# Altium PCB BB_ARM_SWD.PcbDoc
Units mm, origin at the board's own origin, x right, y up, seen from the top; angles counter-clockwise.
Board outline 17 x 29 mm, 2 copper layers (Top Layer, Bottom Layer); 7 components, 11 nets, 44 pads, 0 vias.
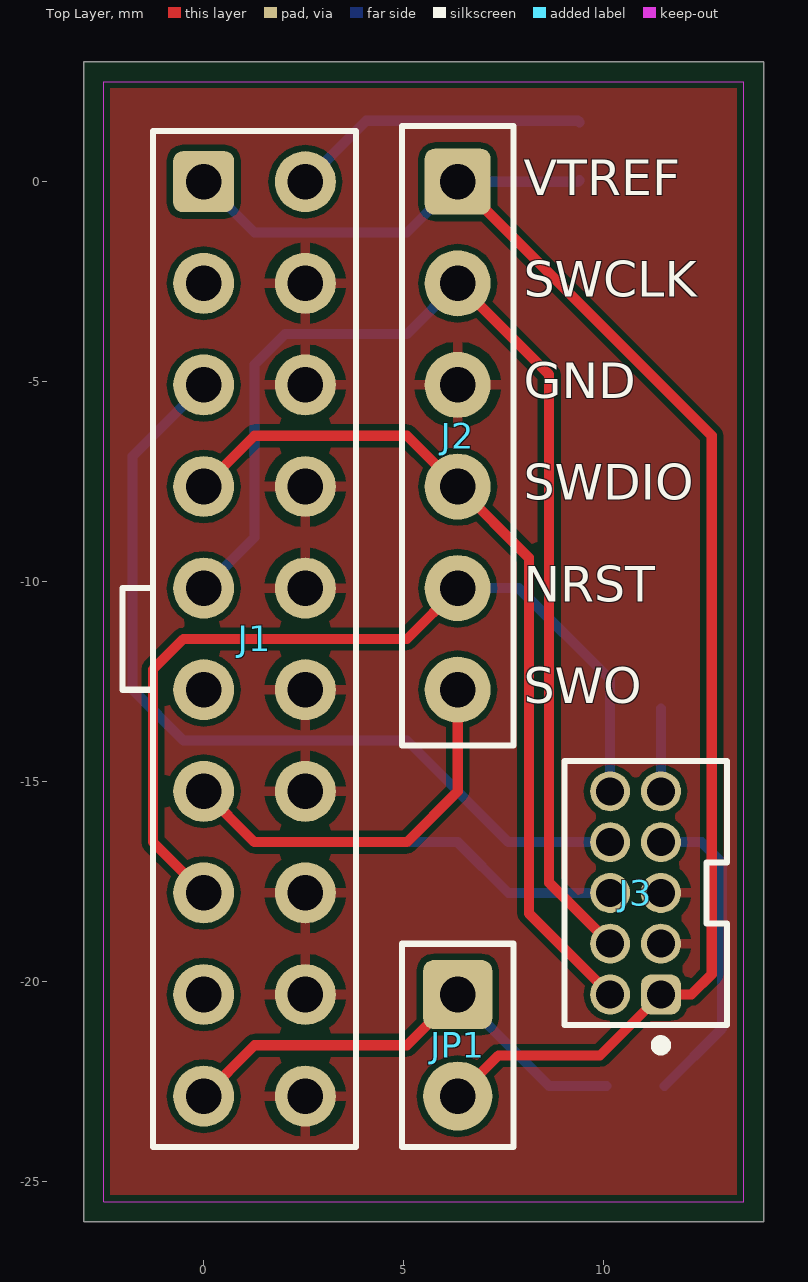
[diagram p0: Top Layer view]
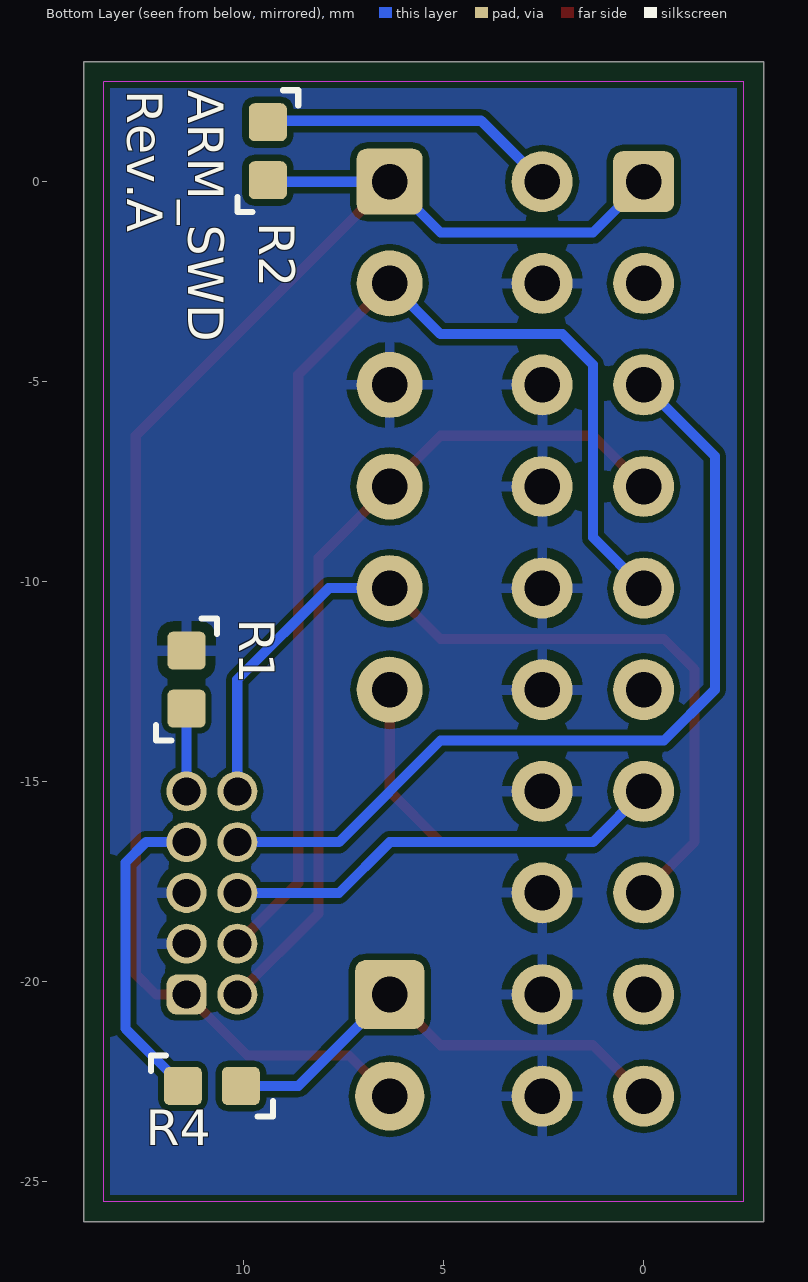
[diagram p1: Bottom Layer view, seen from below]
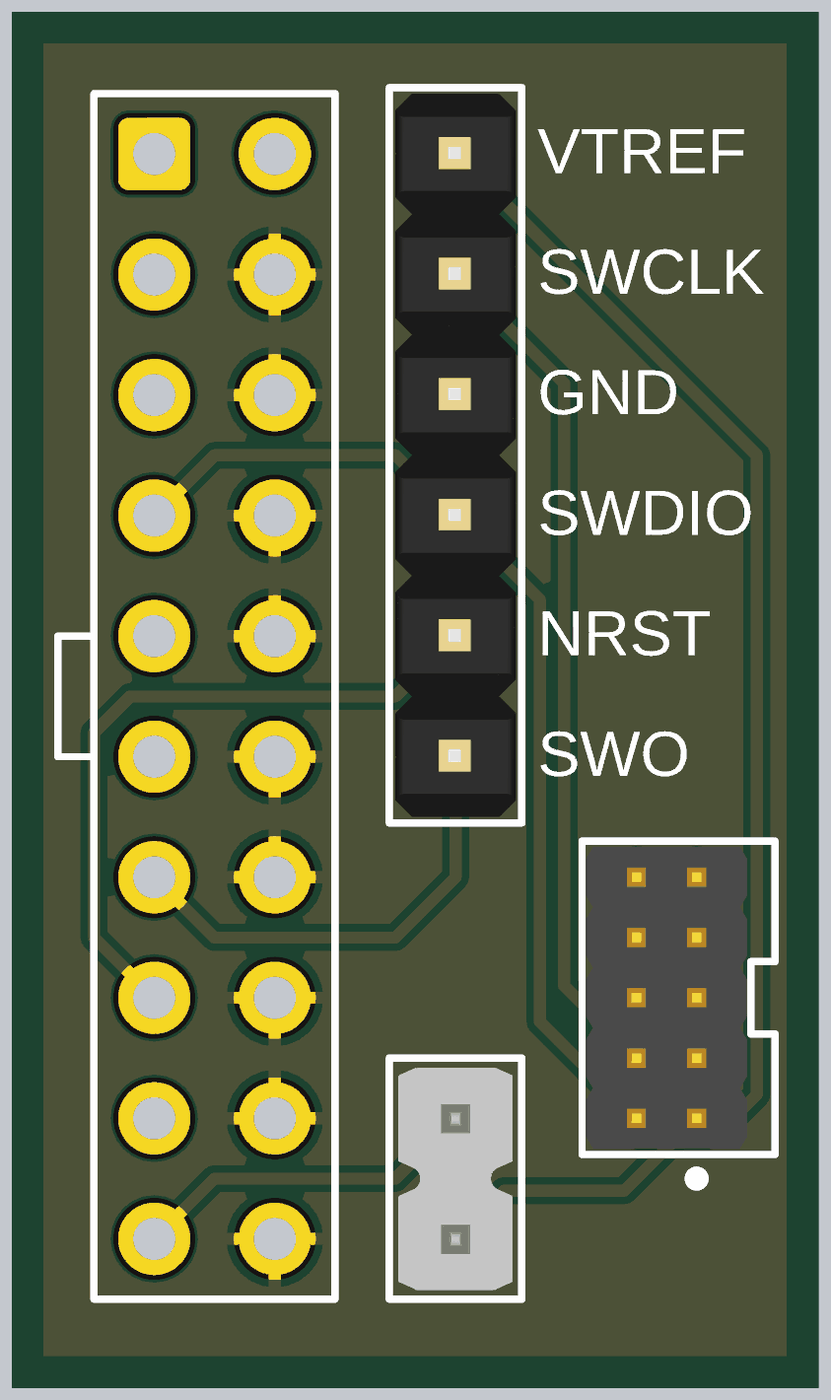
[diagram p2: 3D render of the assembled board from above, using the file's embedded part models]
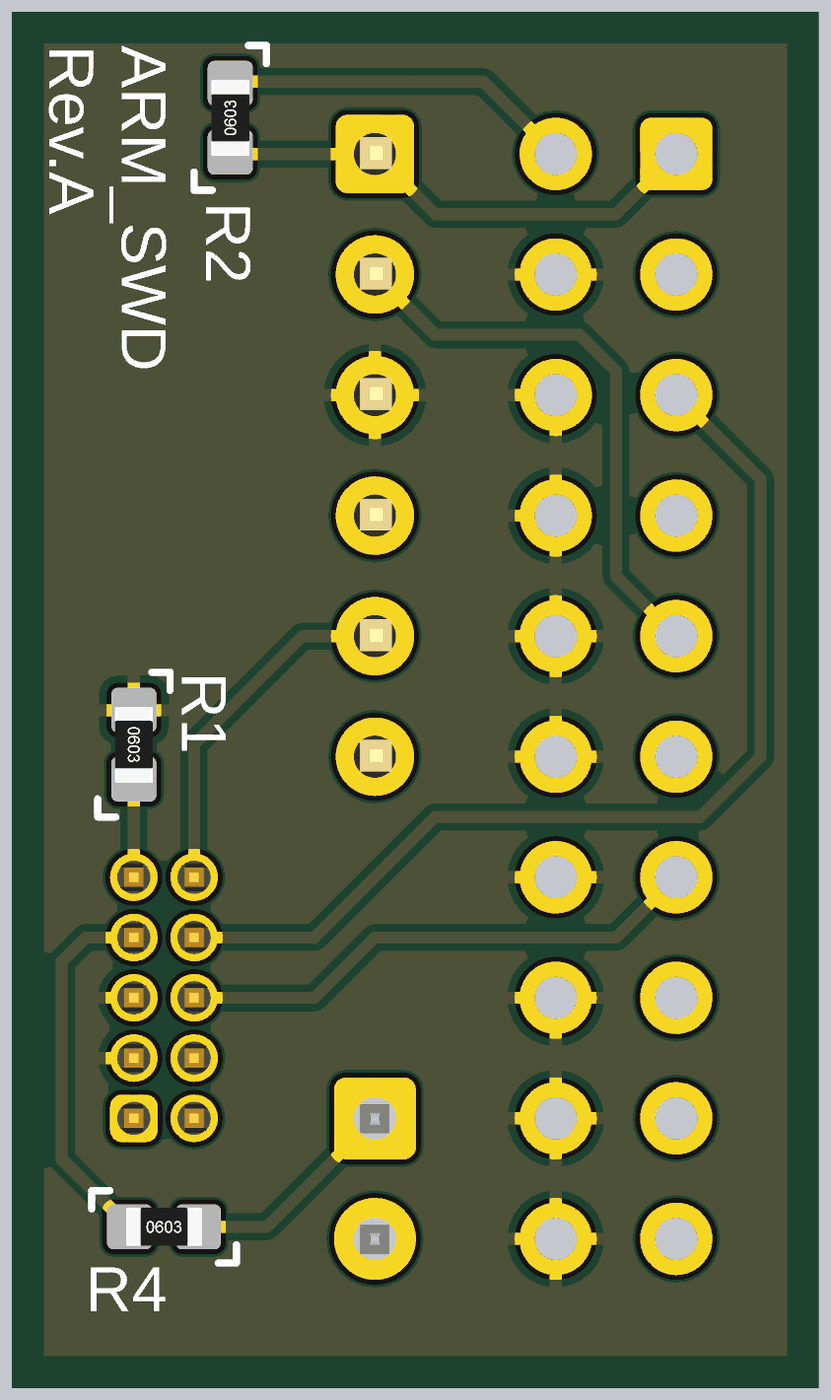
[diagram p3: 3D render of the assembled board from below, using the file's embedded part models]

## Layer stack, top to bottom
Top Solder: solder mask 0.0102, Solder Resist, Dk 3.5
Top Layer: signal copper 0.0356
Dielectric 1: dielectric 0.32, FR-4, Dk 4.8
Bottom Layer: signal copper 0.0356
Bottom Solder: solder mask 0.0102, Solder Resist, Dk 3.5

## Board outline
-3,-26 14,-26 14,3 -3,3

## Design rules (kind name [scope] priority, off if disabled: settings)
Clearance [All] p1: gap=0.152 ignorepadtopadclearanceinfootprint=FALSE
PolygonConnect [All] p1: thpad.connectstyle=Relief thpad.reliefconductorwidth=0.254 thpad.reliefentries=4 thpad.polygonreliefangle="90 Angle" thpad.airgapwidth=0.254 smdpad.connectstyle=Relief smdpad.reliefconductorwidth=0.254 smdpad.reliefentries=4 smdpad.polygonreliefangle="90 Angle" smdpad.airgapwidth=0.254 via.connectstyle=Direct via.reliefconductorwidth=0.254 via.reliefentries=4 via.polygonreliefangle="90 Angle" via.airgapwidth=0.254
RoutingVias [All] p1: holewidth=0.711 width=1.27 viastyle="Through Hole" minholewidth=0.711 minwidth=1.27 maxholewidth=0.711 maxwidth=1.27
SolderMaskExpansion [All] p1: expansion=0.102
Width [All] p1: maxlimit=0.254 minlimit=0.254 preferedwidth=0.254
30 further rules are at their usual default settings.

## Components (designator, comment, footprint, x,y, rotation, side; value= is the part's Value field where it differs from the comment)
J1 "ARM_DEBUG_HEADER_20P" ARM_STD_20P_HEADER-2.54-20P2 0,0 r270 top locked
J2 "PINHDR-6P1" HEADER-2.54-6P1 6.35,-6.35 r270 top locked
J3 "ARM_DEBUG_HEADER_10P" ARM_CORTEX_DEBUG_HEADER-1.27-10P-2R 10.795,-17.78 r90 top locked
JP1 "ON/OFF" HEADER-2.54-2P1 6.35,-21.59 r270 top locked
R1 "0R" R0603_RF_M 11.43,-12.446 r270 bottom
R2 "0R" R0603_RF_M 9.398,0.762 r90 bottom
R4 "0R" R0603_RF_M 10.795,-22.606 r180 bottom locked

## Footprints (in the part's own frame and the unit in brackets; to place one, negate y for a bottom-side part, rotate by r counter-clockwise, add the part's x,y. Pads: shape width x height; smd on the part's side, far side on the other; paste and mask are expansions set on the pad)
ARM_CORTEX_DEBUG_HEADER-1.27-10P-2R [mm] "ARM Cortex-M Debug 10-pin Connector 1.27mm Pitch Through Hole"
  rrect50% 1x1 hole 0.7: 1(-2.54,-0.635)
  round 1 hole 0.7: 2(-2.54,0.635) 3(-1.27,-0.635) 4(-1.27,0.635) 5(0,-0.635) 6(0,0.635) 7(1.27,-0.635) 8(1.27,0.635) 9(2.54,-0.635) 10(2.54,0.635)
  silkscreen extent -3.94,-2.29 3.3,1.78, body extent -3.17,-1.7 3.18,1.7, height 5.31
ARM_STD_20P_HEADER-2.54-20P2 [mil] "ARM Standard 20-Pin Connector 2.54mm Pitch"
  rrect30% 60x60 hole 35: 1(0,0)
  round 60 hole 35: 2(0,100) 3(100,0) 4(100,100) 5(200,0) 6(200,100) 7(300,0) 8(300,100) 9(400,0) 10(400,100) 11(500,0) 12(500,100) 13(600,0) 14(600,100) 15(700,0) 16(700,100) 17(800,0) 18(800,100) 19(900,0) 20(900,100)
  silkscreen extent -50,-80 950,150
HEADER-2.54-2P1 [mil] "Pin Header Single Row 2 Positions Pitch 2.54 mm"
  rrect30% 68x68 hole 35: 1(-50,0)
  round 68 hole 35: 2(50,0)
  silkscreen extent -100,-55 100,55, body extent -92,-47 92,47, height 330
HEADER-2.54-6P1 [mil] "Pin Header Single Row 6 Positions Pitch 2.54 mm"
  rrect30% 65x65 hole 35: 1(-250,0)
  round 65 hole 35: 2(-150,0) 3(-50,0) 4(50,0) 5(150,0) 6(250,0)
  silkscreen extent -305,-55 305,55, body extent -300,-50 300,50, height 362
R0603_RF_M [mm] "Resistor SMD 0603 Reflow Medium Density"
  rrect30% 0.95x0.95 smd: 1(-0.725,0) 2(0.725,0)
  silkscreen extent -1.52,-0.76 1.52,0.76, body extent -0.8,-0.4 0.8,0.4, height 0.45

## Part data
J1: "ARM Standard 20-Pin Header"
J2: "Pin Header Single Row 6 Positions", Mounting Technology=THT
J3: "ARM Cortex Debug 10-Pin Header"
JP1: library part JP-SPST, "Jumper (SPST/ON-OFF)"
R1 R2 R4: library part R, "Resistor", Manufacturer="Generic Brand", Max Voltage="? V", Power Rating="? W", Tolerance=?, Category=Resistor, Mounting Technology=SMT, Supplier Link=http://

## Nets (pads, with @x,y where several pads share a name; then routed paths per layer and width w, separated by ;. In a path a pad name is that pad's centre, name@x,y a point inside that pad or via, vN(x,y) a via of type N, cw(c..) or ccw(c..) an arc to the next point about the centre after c; other vN are vias at no path point)
3V3: J3.7 R4.1 | length 7.9
  Bottom Layer w0.254: J3.7 12.446,-16.51 12.954,-17.018 12.954,-21.172 R4.1
GND: J1.4 J1.6 J1.8 J1.10 J1.12 J1.14 J1.16 J1.18 J1.20 J2.3 J3.3 J3.5 R1.1
NetJ1_2: J1.2 R2.2 | length 7.5
  Bottom Layer w0.254: J1.2 4.064,1.524 9.361,1.524 R2.2
NetJ1_19: J1.19 JP1.1 R4.2 | length 12.1
  Top Layer w0.254: J1.19 1.27,-21.59 5.08,-21.59 JP1.1
  Bottom Layer w0.254: JP1.1 8.636,-22.606 R4.2
NetJ3_9: J3.9 R1.2 | length 2.1
  Bottom Layer w0.254: J3.9 R1.2
RESET: J1.15 J2.5 J3.10 | length 22.1
  Top Layer w0.254: J1.15 -1.27,-16.51 -1.27,-12.192 -0.508,-11.43 5.08,-11.43 J2.5
  Bottom Layer w0.254: J2.5 7.874,-10.16 10.16,-12.446 J3.10
SWCLK: J1.9 J2.2 J3.4 | length 30.1
  Top Layer w0.254: J2.2 8.636,-4.826 8.636,-17.526 J3.4
  Bottom Layer w0.254: J1.9 1.27,-8.89 1.27,-4.572 2.032,-3.81 5.08,-3.81 J2.2
SWDIO: J1.7 J2.4 J3.2 | length 21.7
  Top Layer w0.254: J1.7 1.27,-6.35 5.08,-6.35 J2.4 8.128,-9.398 8.128,-18.288 J3.2
SWO: J1.13 J2.6 J3.6 | length 21.2
  Top Layer w0.254: J1.13 1.27,-16.51 5.08,-16.51 6.35,-15.24 J2.6
  Bottom Layer w0.254: J1.13 1.27,-16.51 6.35,-16.51 7.62,-17.78 J3.6
TDI: J1.5 J3.8 | length 21.9
  Bottom Layer w0.254: J1.5 -1.778,-6.858 -1.778,-12.7 -0.508,-13.97 5.08,-13.97 7.62,-16.51 J3.8
VTREF: J1.1 J2.1 J3.1 JP1.2 R2.1 | length 40.5
  Top Layer w0.254: JP1.2 7.366,-21.844 9.906,-21.844 J3.1 12.192,-20.32 12.7,-19.812 12.7,-6.35 J2.1
  Bottom Layer w0.254: J1.1 1.27,-1.27 5.08,-1.27 J2.1 9.361,0 R2.1
pads on no net: J1.3 J1.11 J1.17

## Polygon pours and split planes (outlines as drawn)
GND on Bottom Layer "NONET_L-01_P-001" (solid, remove dead copper, pour order 2): -2.794,2.794 13.716,2.794 13.716,-25.654 -2.794,-25.654
GND on Top Layer "NONET_L-01_P-001" (solid, remove dead copper, pour order 4): -2.794,2.794 13.716,2.794 13.716,-25.654 -2.794,-25.654

## Keep-outs
Keep-Out Layer:
  lines w0.025: -2.5,-25.5 -2.5,2.5 13.5,2.5 13.5,-25.5 -2.5,-25.5

## Silkscreen, mask and mechanical layers (free items; w line width, h text height)
Top Overlay:
  text "VTREF" at 8.001,-0.635 h1.52
  text "SWCLK" at 8.001,-3.175 h1.52
  text "GND" at 8.001,-5.715 h1.52
  text "SWDIO" at 8.001,-8.255 h1.52
  text "NRST" at 8.001,-10.795 h1.52
  text "SWO" at 8.001,-13.335 h1.52
Bottom Overlay:
  text "ARM_SWD" at 11.684,2.286 h1.52 r90
  text "Rev.A" at 13.208,2.286 h1.52 r90
Mechanical 1:
  the board outline again, w0.076